# Altium PCB casi listo.PcbDoc
Units mm, origin at the board's own origin, x right, y up, seen from the top; angles counter-clockwise.
Board outline 83.69 x 59.69 mm, 2 copper layers (Top Layer, Bottom Layer); 37 components, 24 nets, 107 pads, 0 vias.
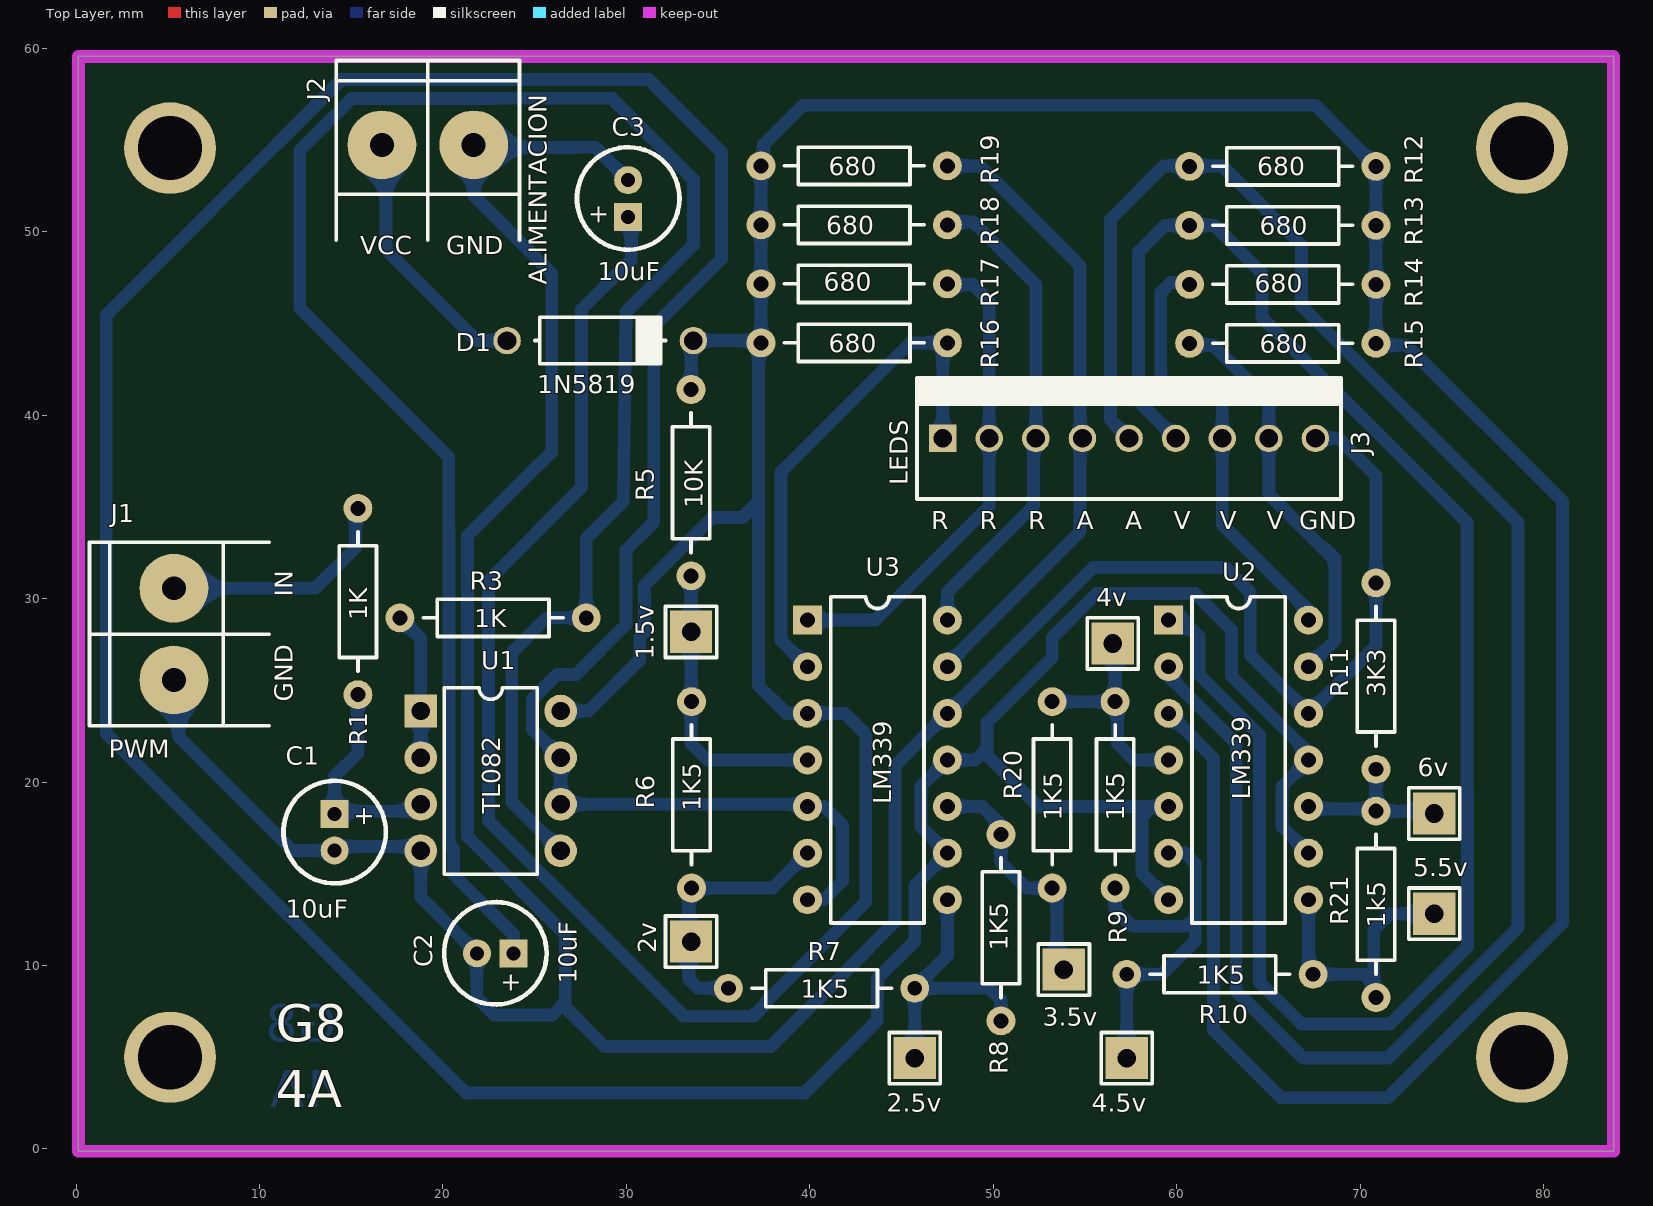
[diagram p0: Top Layer view]
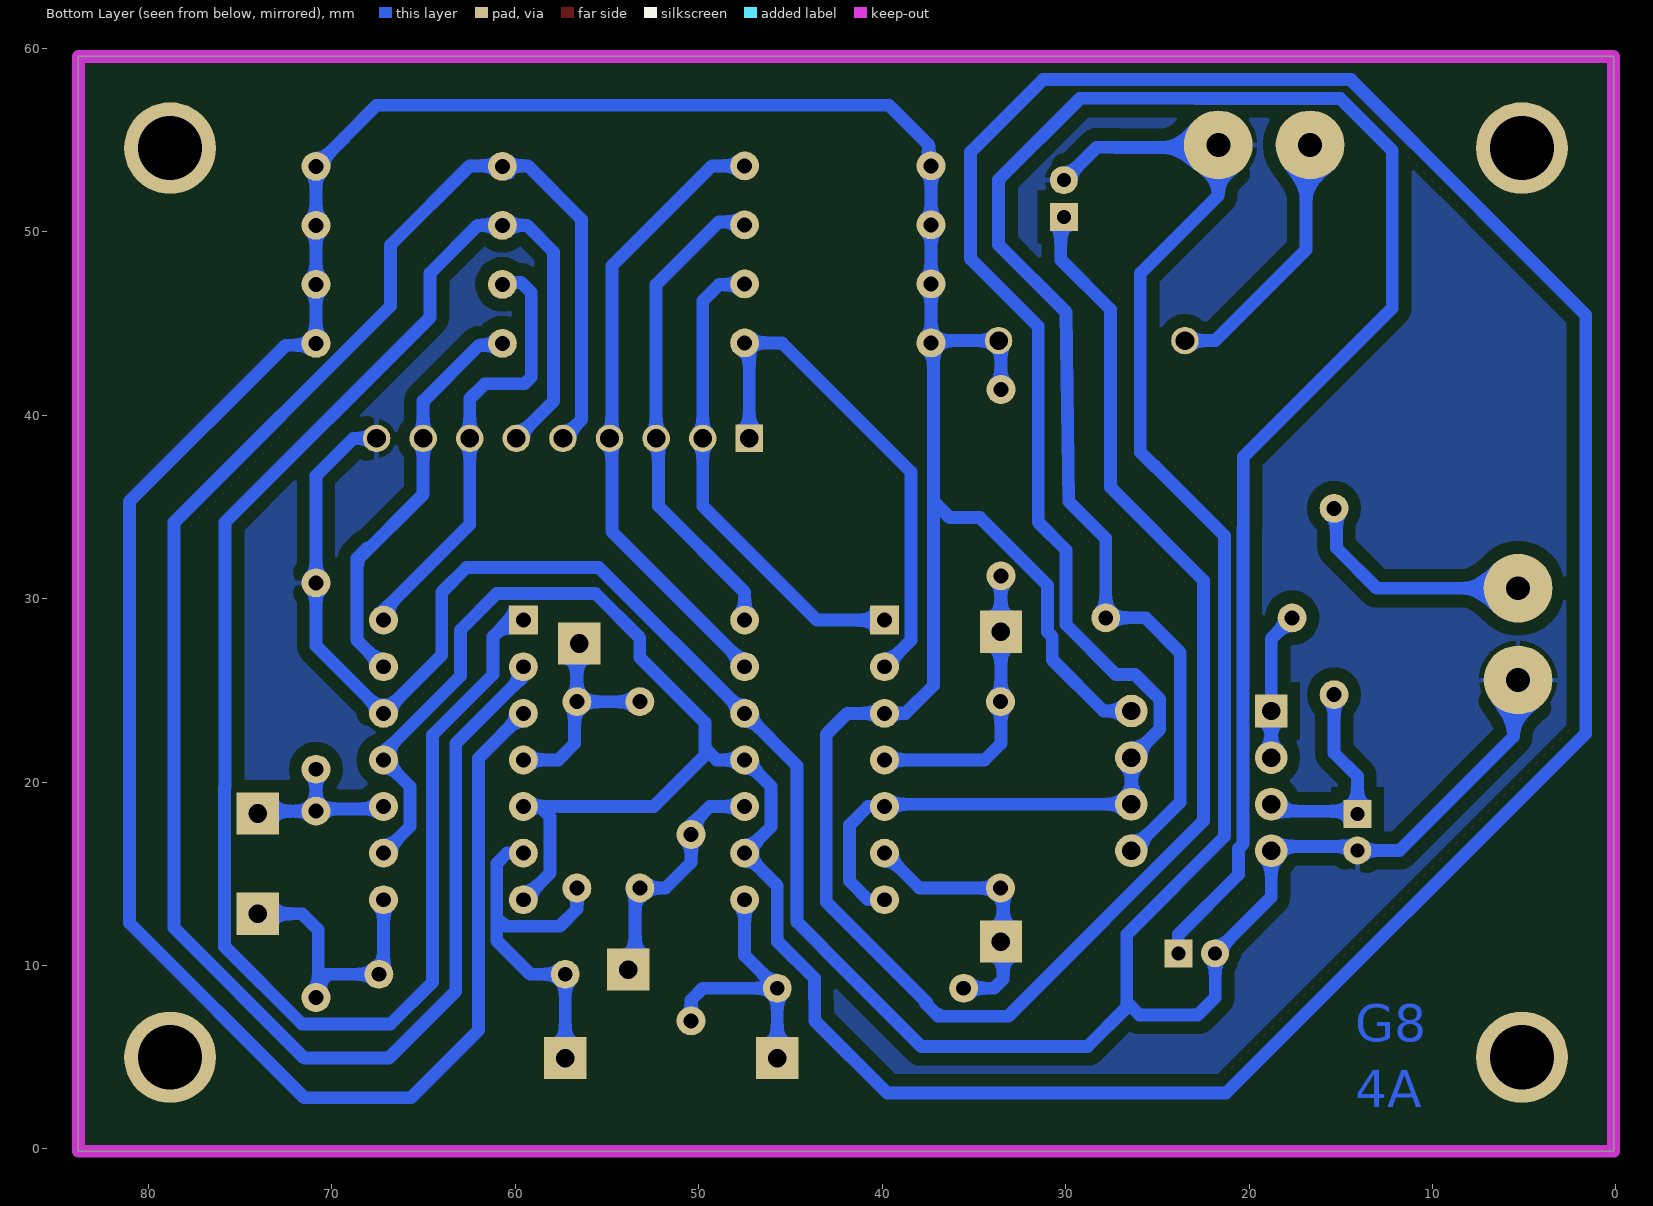
[diagram p1: Bottom Layer view, seen from below]

## Layer stack, top to bottom
Top Solder: solder mask 0.0102, Solder Resist, Dk 3.5
Top Layer: signal copper 0.0356
Dielectric1: dielectric 0.32, FR-4, Dk 4.8
Bottom Layer: signal copper 0.0356
Bottom Solder: solder mask 0.0102, Solder Resist, Dk 3.5

## Board outline
0.127,-0.127 0.127,59.563 83.82,59.563 83.82,-0.127

## Design rules (kind name [scope] priority, off if disabled: settings)
Clearance Polygon [InPolygon] p1: gap=0.7
Clearance [All] p2: gap=0.3
PolygonConnect [All] p1: connectstyle=Relief reliefconductorwidth=0.254 reliefentries=4 polygonreliefangle="90 Angle" airgapwidth=0.254
RoutingVias [All] p1: holewidth=0.711 width=1.27 viastyle="Through Hole" minholewidth=0.711 minwidth=1.27 maxholewidth=0.711 maxwidth=1.27
SolderMaskExpansion [All] p1: expansion=0.102
UnpouredPolygon [All] p1: allowunpoured=FALSE
Width [All] p1: maxlimit=0.7 minlimit=0.254 preferedwidth=0.7 toplayer_maxwidth=0.254 toplayer_prefwidth=0.254 bottomlayer_minwidth=0.7 minimp=50.000000 maximp=50.000000 favimp=50.000000
29 further rules are at their usual default settings.

## Components (designator, comment, footprint, x,y, rotation, side; value= is the part's Value field where it differs from the comment)
1.5v "" TPTH 33.528,28.194 r90 top
2.5v "" TPTH 45.72,4.953 r90 top
2v "" TPTH 33.528,11.303 r0 top
3.5v "" TPTH 53.848,9.779 r90 top
4.5v "" TPTH 57.277,4.953 r90 top
4v "" TPTH 56.515,27.559 r0 top
5.5v "" TPTH 74.041,12.827 r90 top
6v "" TPTH 74.041,18.288 r0 top
C1 "10uF" CAP100RP 14.097,17.272 r270 top
C2 "10uF" CAP100RP 22.86,10.668 r180 top
C3 "10uF" CAP100RP 30.099,51.816 r90 top
D1 "1N5819" DO41 28.575,44.069 r0 top
J1 "PWM" BORNERA2 5.334,28.067 r0 top
J2 "ALIMENTACION" BORNERA2 19.177,54.737 r270 top
J3 "LEDS" MOLEX9 47.244,38.735 r0 top
R1 "1K" RES400 15.367,34.925 r270 top
R3 "1K" RES400 17.653,28.956 r0 top
R5 "10K" RES400 33.528,41.402 r270 top
R6 "1K5" RES400 33.553,14.224 r90 top
R7 "1K5" RES400 45.72,8.763 r180 top
R8 "1K5" RES400 50.419,17.145 r270 top
R9 "1K5" RES400 56.642,14.224 r90 top
R10 "1K5" RES400 67.437,9.525 r180 top
R11 "3K3" RES400 70.866,30.861 r270 top
R12 "680" RES400 60.706,53.569 r0 top
R13 "680" RES400 60.706,50.351 r0 top
R14 "680" RES400 60.706,47.134 r0 top
R15 "680" RES400 60.706,43.917 r0 top
R16 "680" RES400 47.498,43.942 r180 top
R17 "680" RES400 47.498,47.159 r180 top
R18 "680" RES400 47.498,50.377 r180 top
R19 "680" RES400 47.498,53.594 r180 top
R20 "1K5" RES400 53.213,24.384 r270 top
R21 "1k5" RES400 70.866,18.415 r270 top
U1 "TL082" DIP8 22.606,20.066 r0 top
U2 "LM339" DIP14 59.563,28.829 r0 top
U3 "LM339" DIP14 39.878,28.829 r0 top

## Footprints (in the part's own frame and the unit in brackets; to place one, negate y for a bottom-side part, rotate by r counter-clockwise, add the part's x,y. Pads: shape width x height; smd on the part's side, far side on the other; paste and mask are expansions set on the pad)
BORNERA2 [mm] "Bornera con Tornillos 5mm separación"
  round 3.75 hole 1.3: 1(0,2.5) 2(0,-2.5)
  silkscreen extent -4.6,-5 5.2,5, body extent -3.76,-4.89 3.94,5.61, height 10
CAP100RP [mil] "Body diameter 5mm"
  rect 60x60 hole 30: 1(-39.37,0)
  round 60 hole 30: 2(39.37,0)
  silkscreen extent -110,-110 110,110, body extent -99,-99 99,100, height 454
DIP8 [mil]
  rect 70x70 hole 39.37: 1(-150,150)
  round 70 hole 39.37: 2(-150,50) 3(-150,-50) 4(-150,-150) 5(150,-150) 6(150,-50) 7(150,50) 8(150,150)
  silkscreen extent -100,-200 100,200
DIP14 [mil]
  rect 62x62 hole 32: 1(0,0)
  round 62 hole 32: 2(0,-100) 3(0,-200) 4(0,-300) 5(0,-400) 6(0,-500) 7(0,-600) 8(300,-600) 9(300,-500) 10(300,-400) 11(300,-300) 12(300,-200) 13(300,-100) 14(300,0)
  silkscreen extent 50,-650 250,50, body extent -5,-675 305,75, height 165
DO41 [mm]
  round 1.5 hole 1.016: 1(-5.08,0) 2(5.08,0)
  silkscreen extent -3.56,-1.27 3.56,1.27, body extent -5.46,-1.19 5.46,1.37, height 2.03
MOLEX9 [mm]
  rect 1.5x1.5 hole 1.016: 1(0,0)
  round 1.5 hole 1.016: 2(2.54,0) 3(5.08,0) 4(7.62,0) 5(10.16,0) 6(12.7,0) 7(15.24,0) 8(17.78,0) 9(20.32,0)
  silkscreen extent -1.4,-3.3 21.72,3.3, body extent -1.27,-3.18 21.59,3.17, height 10.74
RES400 [mil]
  round 62 hole 32: 1(0,0) 2(400,0)
  silkscreen extent 50,-40 350,40, body extent -12,-45 412,46, height 96
TPTH [mm]
  rect 2.3x2.3 hole 1.016: 1(0,0)
  silkscreen extent -1.4,-1.4 1.4,1.4, body extent -1.27,-1.27 1.27,1.27, height 6.04

## Part data
1.5v 2.5v 2v 3.5v 4.5v 4v 5.5v 6v: library part TP
C1 C2 C3: library part CAPPOL
D1: library part DIODO
J1 J2: library part "BORNERA 2"
J3: library part MOLEX9
R1 R3 R5 R6 R7 R8 R9 R10 R11 R12 R13 R14 R15 R16 R17 R18 R19 R20 R21: library part RES
U2 U3: "Comparador Open Collector"

## Free pads (board coordinates)
  round 5 hole 3.5: 0(5.127,5) 2(5.127,54.563) 3(78.82,5) 6(78.82,54.563)

## Nets (pads, with @x,y where several pads share a name; then routed paths per layer and width w, separated by ;. In a path a pad name is that pad's centre, name@x,y a point inside that pad or via, vN(x,y) a via of type N, cw(c..) or ccw(c..) an arc to the next point about the centre after c; other vN are vias at no path point)
FILTRO: U1.6 U1.7 U2.5 U2.7 U2.9 U2.11 U3.5 U3.7 U3.9 U3.11 | length 249.1
  Bottom Layer w0.7: 7.353,51.194 14.453,58.293 31.242,58.293 35.179,54.356 35.179,48.514 31.496,44.831 31.496,34.163 29.988,32.655 29.988,28.591 27.254,25.857 26.212,25.857 24.867,24.512 24.867,22.885 U1.7 U1.6 U3.5@40.03,18.796 ; 7.366,51.181 1.651,45.466 1.651,22.657 21.26,3.048 39.726,3.048 43.675,6.997 43.693,9.308 45.689,11.303 45.72,11.303 45.72,14.351 U3.9 46.061,17.566 46.061,19.772 U3.11 49.022,21.209 49.53,21.717 ; U3.7 40.767,13.589 41.783,14.605 41.783,17.653 40.767,18.669 U3.5 ; U2.7 58.115,15.037 58.115,18.11 58.674,18.669 U2.5 52.451,18.669 49.657,21.463 49.657,23.241 53.213,26.797 53.213,27.864 55.626,30.277 61.011,30.277 62.992,28.296 62.992,25.781 67.183,21.59 U2.11 65.735,19.761 65.735,17.577 U2.9
GND: C1.2 C2.2 C3.2 J1.2 J2.1 J3.9 R11.1 U1.4 U2.12 U3.12 | length 177.1
  Bottom Layer w0.7: J1.2@5.588,25.527 5.588,22.479 11.795,16.272 C1.2 14.32,16.495 18.557,16.495 U1.4 18.796,13.732 C2.2@21.717,10.811 ; J2.1@21.606,54.594 27.305,54.594 ; J2.1 21.677,51.983 25.933,47.727 25.933,37.998 25.146,37.211 ; C2.2@21.844,10.795 21.844,8.255 22.796,7.302 25.971,7.302 26.67,8.001 ; 25.133,37.224 21.336,33.426 21.336,17.032 26.67,11.698 26.67,7.731 28.813,5.588 37.871,5.588 43.256,10.973 43.256,10.998 44.64,12.383 44.64,20.892 U3.12 55.448,31.699 62.662,31.699 64.008,30.353 64.008,26.924 U2.12 70.866,27.432 R11.1 70.866,36.703 68.834,38.735 J3.9 ; 27.178,54.61 28.305,54.61 C3.2
LED1: J3.1 R16.1 U3.2 | length 28.7
  Bottom Layer w0.7: U3.2 38.43,27.737 38.43,36.906 45.466,43.942 R16.1 ; J3.1 47.244,43.307 R16.1@47.879,43.942
LED2: J3.2 R17.1 U3.1 | length 26.3
  Bottom Layer w0.7: U3.1 43.561,28.829 49.784,35.052 J3.2 49.784,46.228 48.895,47.117 R17.1@47.498,47.117
LED3: J3.3 R18.1 U3.14 | length 26.5
  Bottom Layer w0.7: U3.14 47.498,30.353 52.197,35.052 J3.3@52.197,38.608 ; R18.1@47.752,50.546 48.895,50.546 52.324,47.117 J3.3 J3.3@52.197,38.608 ; J3.3@52.197,38.862 J3.3@52.197,38.608
LED4: J3.4 R19.1 U3.13 | length 34.5
  Bottom Layer w0.7: U3.13 47.498,26.416 54.737,33.655 54.737,48.133 49.276,53.594 R19.1 ; J3.4@54.737,38.862 J3.4
LED5: J3.5 R12.1 U2.2 | length 107.5
  Bottom Layer w0.7: J3.5 56.388,39.751 56.388,50.673 59.309,53.594 R12.1@60.706,53.594 ; U2.2 59.563,25.782 63.246,22.099 63.246,8.602 66.895,4.953 71.501,4.953 78.613,12.065 78.613,34.163 78.587,34.163 66.802,45.948 66.802,49.276 62.484,53.594 60.731,53.594 R12.1@60.338,53.2
LED6: J3.6 R13.1 U2.1 | length 96.5
  Bottom Layer w0.7: U2.1 60.325,28.829 61.214,27.94 61.214,25.868 64.516,22.566 64.516,9.093 66.802,6.807 71.628,6.807 75.844,11.024 75.844,19.708 75.819,19.733 75.819,34.163 64.643,45.339 64.643,47.752 62.044,50.351 R13.1 ; J3.6 57.912,40.767 57.912,48.895 59.368,50.351 R13.1@60.139,50.351
LED7: J3.7 R14.1 U2.14 | length 24.3
  Bottom Layer w0.7: R14.1@60.706,47.244 59.69,47.244 59.131,46.685 59.131,42.088 59.499,41.719 61.658,41.719 62.484,40.894 J3.7 62.484,34.036 67.183,29.337 U2.14
LED8: J3.8 R15.1 U2.13 | length 23.4
  Bottom Layer w0.7: R15.1@60.579,43.815 61.976,43.815 65.024,40.767 J3.8 65.024,35.687 68.58,32.131 68.58,31.877 ; U2.13 68.631,27.737 68.631,32.207 68.072,32.766
Net1.5v_1: 1.5v.1 R5.2 R6.2 U3.4 | length 16.2
  Top Layer w0.254: R5.2 R5.2@33.528,31.496
  Bottom Layer w0.7: 1.5v.1@33.401,27.559 1.5v.1@33.528,27.686 ; R6.2@33.528,24.257 33.528,22.098 34.417,21.209 U3.4 ; R6.2@33.528,24.384 1.5v.1@33.528,27.686 ; R5.2 1.5v.1 1.5v.1@33.528,27.686
Net2.5v_1: 2.5v.1 R7.1 R8.2 U3.8 | length 15.5
  Bottom Layer w0.7: 2.5v.1 R7.1 ; U3.8 47.498,10.541 R7.1 ; R8.2 50.419,8.128 49.784,8.763 R7.1
Net2v_1: 2v.1 R6.1 R7.2 U3.6 | length 14.5
  Bottom Layer w0.7: R7.2 33.909,8.763 33.401,9.271 33.401,14.097 33.528,14.224 37.973,14.224 U3.6
Net3.5v_1: 3.5v.1 R8.1 R20.2 U3.10 | length 13
  Bottom Layer w0.7: U3.10 49.403,18.669 50.419,17.653 R8.1 50.419,15.621 51.816,14.224 R20.2 53.467,13.97 53.467,10.287 3.5v.1@53.34,10.16
Net4.5v_1: 4.5v.1 R9.1 R10.2 U2.6 | length 21.4
  Bottom Layer w0.7: R9.1@56.642,14.478 56.642,13.081 57.582,12.141 60.482,12.141 61.011,12.573 ; 4.5v.1@57.15,4.826 4.5v.1 R10.2 59.182,9.525 61.011,11.354 61.011,12.573 ; U2.6 60.452,16.129 61.011,15.57 61.011,12.954 61.011,12.573
Net4v_1: 4v.1 R9.2 R20.1 U2.4 | length 12.4
  Bottom Layer w0.7: R20.1 R9.2@56.388,24.384 ; R9.2 R9.2@56.642,24.638 ; 4v.1@56.642,27.559 R9.2@56.642,24.638 ; U2.4@59.563,21.336 U2.4 57.658,21.209 56.769,22.098 56.769,24.13 56.451,24.447 R9.2@56.642,24.638
Net5.5v_1: 5.5v.1 R10.1 R21.2 U2.8 | length 16.1
  Bottom Layer w0.7: U2.8 67.183,9.525 R10.1@67.31,9.398 ; R10.1 70.231,9.525 70.739,9.017 R21.2@70.739,8.382 ; R21.2@70.739,8.128 R21.2@70.739,8.382 ; R21.2 R21.2@70.739,8.382 ; 5.5v.1 71.628,12.827 70.739,11.938 R21.2@70.739,8.382
Net6v_1: 6v.1 R11.2 R21.1 U2.10 | length 10.1
  Bottom Layer w0.7: U2.10 67.31,18.542 70.739,18.542 R21.1 ; R11.2 R21.1 ; 6v.1@73.279,18.288 6v.1 ; 6v.1@74.041,18.542 73.914,18.415 R21.1
NetC1_1: C1.1 R1.2 U1.3 | length 11.4
  Bottom Layer w0.7: C1.1 14.097,20.32 15.367,21.59 R1.2 ; C1.1@14.605,18.415 18.415,18.415 U1.3
NetC2_1: C2.1 R3.2 U1.5 | length 116.1
  Bottom Layer w0.7: C2.1 23.86,11.684 20.574,14.97 20.574,16.38 20.336,16.618 20.336,33.841 20.32,33.857 20.32,37.719 12.192,45.847 12.192,54.428 15.026,57.262 22.926,57.262 22.941,57.277 29.21,57.277 33.655,52.832 33.655,49.293 29.972,45.61 29.831,35.292 27.813,33.274 R3.2 25.654,28.956 23.749,27.051 23.749,18.923 U1.5
NetD1_1: D1.1 J2.2 | length 14.6
  Bottom Layer w0.7: J2.2@16.764,54.864 16.891,54.737 16.891,49.022 21.844,44.069 D1.1
NetJ1_1: J1.1 R1.1 | length 12.9
  Bottom Layer w0.7: J1.1 13.041,30.567 15.24,32.766 R1.1@15.24,34.798 ; R1.1@15.303,34.861 R1.1@15.367,34.798
NetR3_1: R3.1 U1.1 U1.2 | length 7.1
  Bottom Layer w0.7: R3.1 18.796,27.813 18.796,24.892 ; U1.2 U1.1
VCC: C3.1 D1.2 R5.1 R12.2 R13.2 R14.2 R15.2 R16.2 R17.2 R18.2 R19.2 U1.8 U2.3 U3.3 | length 258.5
  Bottom Layer w0.7: U1.8 27.94,23.876 30.734,26.67 30.734,27.923 30.988,28.177 30.988,30.735 34.67,34.417 36.322,34.417 37.211,35.306 ; C3.1@30.099,50.927 30.271,50.755 30.271,48.469 27.559,45.758 27.559,36.068 22.479,30.988 22.479,17.889 33.129,7.239 36.957,7.239 ; R5.1 D1.2@33.528,44.069 ; D1.2@33.528,44.196 D1.2@33.528,44.069 ; 36.957,7.366 37.059,7.366 37.643,7.95 ; R16.2@37.084,43.942 37.211,43.942 37.211,35.306 ; R16.2@37.084,44.069 D1.2 33.655,44.196 D1.2@33.528,44.069 ; R17.2@37.211,46.863 37.338,46.736 R16.2 37.465,43.942 R16.2@37.338,44.069 ; R17.2 R18.2 R19.2 ; R19.2@37.465,53.721 37.465,54.737 39.624,56.896 67.564,56.896 69.342,55.118 69.342,55.093 R12.2 ; 37.592,8.001 43.053,13.462 43.053,22.606 41.91,23.749 U3.3 38.735,23.749 37.211,25.273 37.211,35.306 ; U2.3 62.011,21.301 62.011,6.476 65.692,2.794 71.501,2.794 81.026,12.319 81.026,35.306 72.517,43.815 R15.2@70.739,43.815 ; R15.2 R14.2 R13.2 R12.2@70.866,53.34

## Polygon pours and split planes (outlines as drawn)
GND on Bottom Layer "Polygon" (solid, remove dead copper, pour order 3): -2.921,62.865 -1.016,60.96 86.614,60.96 86.614,-2.032 86.233,-2.413 85.598,-1.778 -2.794,-1.778

## Keep-outs
Keep-Out Layer:
  the board outline again, w0.7

## Other copper
Bottom Layer:
  text "G8" at 14.224,5.842 h2
  text "4A" at 14.224,2.286 h2

## Silkscreen, mask and mechanical layers (free items; w line width, h text height)
Top Overlay:
  text "VCC" at 15.494,48.768 h1
  text "GND" at 20.193,48.768 h1
  text "R" at 46.609,33.782 h1
  text "R" at 49.258,33.782 h1
  text "R" at 51.907,33.782 h1
  text "A" at 54.556,33.782 h1
  text "A" at 57.204,33.782 h1
  text "V" at 59.853,33.782 h1
  text "V" at 62.357,33.782 h1
  text "V" at 64.897,33.782 h1
  text "GND" at 66.675,33.782 h1
  text "IN" at 11.811,30.099 h1 r90
  text "GND" at 11.811,24.384 h1 r90
  text "G8" at 10.892,5.842 h2
  text "4A" at 10.892,2.286 h2

## Text inside footprints (layer, text, board x,y; h text height)
C1: Top Overlay "+" at 15.265,18.72 h1.02 r270
C2: Top Overlay "+" at 24.308,9.5 h1.02 r180
C3: Top Overlay "+" at 28.931,50.368 h1.02 r90